# EAGLE board board1 (EAGLE 9.6.2)
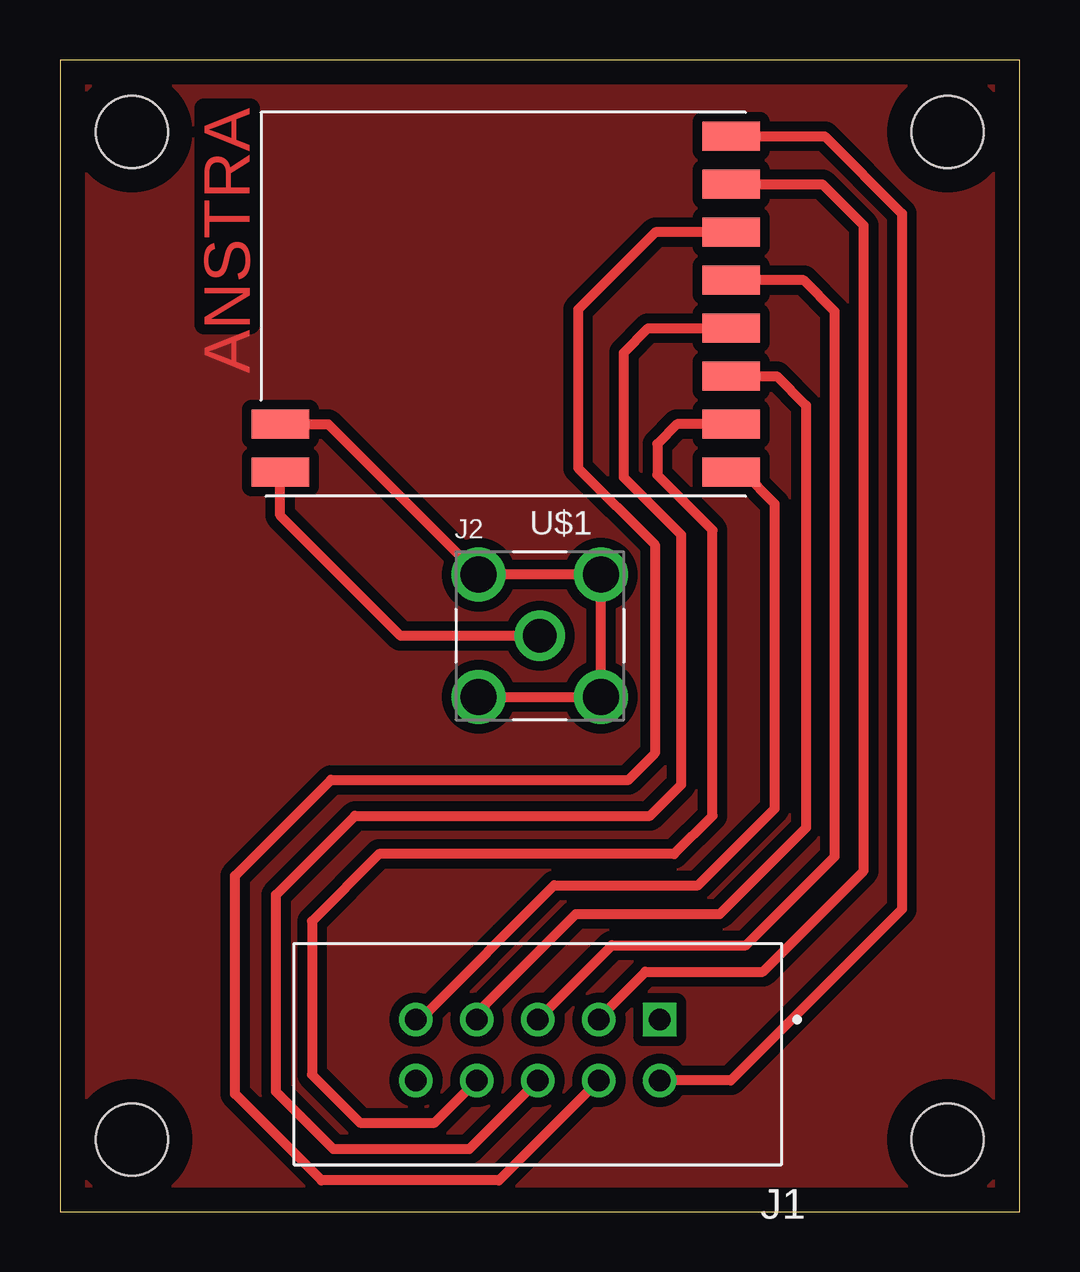
[diagram p0: board, top side]

Size 40 x 48 mm. Coordinates in mm from the lower left corner, seen from the top.
Outline: 0,0 40,0 40,48 0,48 0,0
Copper layers (1*16): Top 0.035mm / dielectric 1.5mm / Bottom 0.035mm
Design rules "default": minimum track width 6mil, minimum drill 0.35mm, track to track 6mil, track to pad 6mil, pad to pad 6mil, via to via 6mil, smd to smd 6mil, copper to edge 40mil, drill to drill 6mil, minimum pad ring 10mil, minimum via ring 8mil, stop-mask expansion 4mil, vias tented up to drill 0mil, thermal gap 10mil
Holes 3 mm at 37,45 37,3 3,45 3,3

## Footprints (pad centres in the part's own frame; a part is rotated, then mirrored left to right if it is on the bottom)
TE_2-1761603-3 = drill 0.89 pad 1.24 square: 1 0,0 | drill 0.89 pad 1.24: 2 0,2.54; 3 2.54,0; 4 2.54,2.54; 5 5.08,0; 6 5.08,2.54; 7 7.62,0; 8 7.62,2.54; 9 10.16,0; 10 10.16,2.54
LINX_CONSMA001 = drill 1.4: 1 0,0 | drill 1.5: S1 -2.55,2.55; S2 -2.55,-2.55; S3 2.55,-2.55; S4 2.55,2.55
HM-TRLR-S-868 = smd 2.4 x 1.2: ANT 8.8,7; CONFIG -10,-1; GND1 -10,3; GND2 8.8,5; RESET -10,-7; RXD -10,1; SLEEP -10,-3; STATUS -10,-5; TXD -10,5; VCC -10,7

## Placement (x,y rotation side)
J1  2-1761603-3  [TE_2-1761603-3]  25,8 180 top
J2  CONSMA001  [LINX_CONSMA001]  20,24 0 top
U$1  [HM-TRLR-S-868]  17.98,37.82 180 top

## Library data of the parts
J1 = SMA-female; AVAILABILITY: In Stock; COMMENT: 2-1761603-3; DESCRIPTION: Header, Pin, Idc, Amp-Latch, 10 Pos, Low Profile, Pcb, Vertical, Blue; EU_ROHS_COMPLIANCE: Compliant; MF: TE Connectivity; MP: 2-1761603-3; PACKAGE: None; PRICE: None; PURCHASE-URL: https://pricing.snapeda.com/search/part/2-1761603-3/?ref=eda
J2 = IDC-10pin; AVAILABILITY: In Stock; DESCRIPTION: SMA Female Through-Hole Mount Connector; MF: Linx Technologies; MP: CONSMA001; PACKAGE: None; PRICE: None; PURCHASE-URL: https://pricing.snapeda.com/search/part/CONSMA001/?ref=eda
U$1 = HM-TRLR-S-868; HM-TRLR-S-868: U1

## Nets
N$1: J2.1 U$1.ANT
N$2: J2.S1 J2.S2 J2.S3 J2.S4 U$1.GND2
N$3: J1.9 U$1.VCC
N$4: J1.8 U$1.TXD
N$5: J1.7 U$1.GND1
N$6: J1.6 U$1.RXD
N$7: J1.5 U$1.CONFIG
N$8: J1.4 U$1.SLEEP
N$9: J1.3 U$1.STATUS
N$10: J1.2 U$1.RESET

## Tracks (layer width: path | path; a pad name or v marks a point on that pad's centre or on a via)
GND
  pour Top (isolate 0.406): 0,48 40,48 40,0 0,0
N$1
  Top 0.406: J2.1 14.2,24 9.18,29.02 U$1.ANT
N$2
  Top 0.406: J2.S2 J2.S3 J2.S4 J2.S1 11.18,32.82 U$1.GND2 9.06,32.7
N$3
  Top 0.406: J1.9 15,8 20.6,13.6 26.6,13.6 29.8,16.8 29.8,29.5 28.48,30.82 U$1.VCC
N$4
  Top 0.406: J1.8 15.62,3.7 12.5,3.7 10.5,5.7 10.5,12.1 13.3,14.9 25.6,14.9 27.2,16.5 27.2,28.4 24.9,30.7 24.9,32 25.72,32.82 U$1.TXD
N$5
  Top 0.406: J1.7 17.7,8.32 17.7,8.6 21.5,12.4 27.5,12.4 31.1,16 31.1,33.6 29.88,34.82 U$1.GND1 28,34.8
N$6
  Top 0.406: J1.6 17.06,2.6 11.4,2.6 9,5 9,13.2 12.3,16.5 24.6,16.5 25.9,17.8 25.9,28.2 23.5,30.6 23.5,35.8 24.52,36.82 U$1.RXD
N$7
  Top 0.406: J1.5 19.92,8.02 23,11.1 28.6,11.1 32.3,14.8 32.3,37.52 31,38.82 U$1.CONFIG 28,38.8
N$8
  Top 0.406: J1.4 18.3,1.3 10.9,1.3 7.3,4.9 7.3,14 11.3,18 23.7,18 24.8,19.1 24.8,27.8 21.6,31 21.6,37.6 24.82,40.82 U$1.SLEEP
N$9
  Top 0.406: U$1.STATUS 31.78,42.82 33.5,41.1 33.5,14.2 29.3,10 24.4,10 22.46,8.06 J1.3
N$10
  Top 0.406: U$1.RESET 31.88,44.82 35.1,41.6 35.1,12.6 27.96,5.46 J1.2

## Text on the board
Top: ANSTRA